# EAGLE board 19p_connector (EAGLE 6.3)
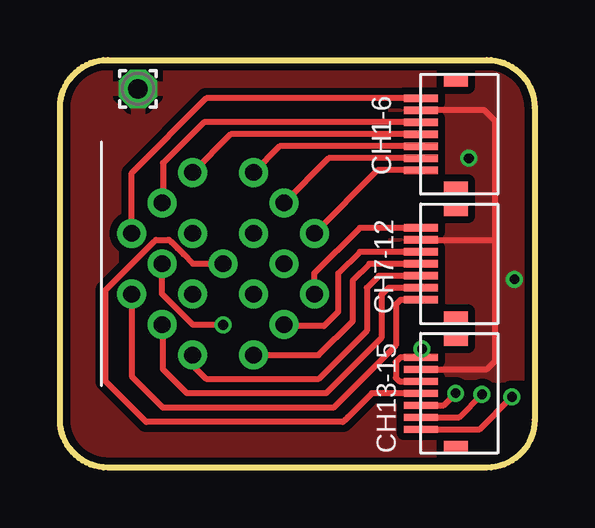
[diagram p0: board, top side]
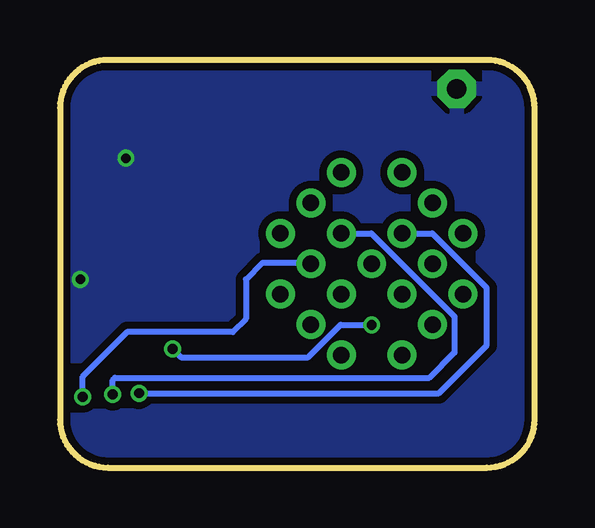
[diagram p1: board, bottom side, seen from below]

Size 19.8 x 17 mm. Coordinates in mm from the lower left corner, seen from the top.
Outline: 19.8,15 19.8,2 arc-90 17.8,0 2,0 arc-90 0,2 0,15 arc-90 2,17 17.8,17 arc-90 19.8,15
Copper layers (1*16): Top 0.035mm / dielectric 1.5mm / Bottom 0.035mm
Design rules "Fusion_eagle_rule_v1.1": minimum track width 6mil, minimum drill 12mil, track to track 6mil, track to pad 6mil, pad to pad 6mil, via to via 6mil, smd to smd 0mil, copper to edge 10mil, drill to drill 10mil, minimum pad ring 10mil, minimum via ring 6mil, stop-mask expansion 2mil, vias tented up to drill 100mil, thermal gap 10mil

## Footprints (pad centres in the part's own frame; a part is rotated, then mirrored left to right if it is on the bottom)
19PIN_LEMO = drill 0.7: P$1 -3.81,-1.27; P$2 -2.54,-2.54; P$3 -1.27,-3.81; P$4 1.27,-3.81; P$5 2.54,-2.54; P$6 3.81,-1.27; P$7 3.81,1.27; P$8 2.54,2.54; P$9 1.27,3.81; P$10 -1.27,3.81; P$11 -2.54,2.54; P$12 -3.81,1.27; P$13 -2.54,0; P$14 -1.27,-1.27; P$15 1.27,-1.27; P$16 2.54,0; P$17 1.27,1.27; P$18 -1.27,1.27; P$19 0,0
7P_ZIF_59453-071110EDHLF = smd 0.3 x 1.4: P$1 -1.5,1.6; P$2 -1,1.6; P$3 -0.5,1.6; P$4 0,1.6; P$5 0.5,1.6; P$6 1,1.6; P$7 1.5,1.6 | smd 0.52 x 1: ST1 -2.24,0.15; ST2 2.24,0.15
1,6/0,8 = drill 0.813 pad 1.6 octagon: 1 0,0

## Placement (x,y rotation side)
C1  19PIN_LEMO  [19PIN_LEMO]  6.8,8.5 180 top
H1  7P_ZIF_59453-071110EDHLF  [7P_ZIF_59453-071110EDHLF]  16.65,13.9 90 top
H2  7P_ZIF_59453-071110EDHLF  [7P_ZIF_59453-071110EDHLF]  16.65,8.5 90 top
H3  7P_ZIF_59453-071110EDHLF  [7P_ZIF_59453-071110EDHLF]  16.65,3.1 90 top
PAD1  [1,6/0,8]  3.25,15.8 0 top

## Library data of the parts
C1 H1-H3 = CYCFI_Con
PAD1 = wirepad

## Nets
CH1: C1.P$1 H1.P$1
CH2: C1.P$2 H1.P$2
CH3: C1.P$3 H1.P$3
CH4: C1.P$4 H1.P$4
CH5: C1.P$5 H1.P$5
CH6: C1.P$6 H1.P$7
CH7: C1.P$7 H2.P$1
CH8: C1.P$8 H2.P$2
CH9: C1.P$9 H2.P$3
CH10: C1.P$10 H2.P$4
CH11: C1.P$11 H2.P$5
CH12: C1.P$12 H2.P$7
CH13: C1.P$13 H3.P$1
CH14: C1.P$14 H3.P$2
CH15: C1.P$15 H3.P$3
GND: H1.P$6 H2.P$6 H3.P$6 PAD1.1
N$1: C1.P$19 H3.P$4
VCC: C1.P$16 H3.P$5 H3.P$7

## Tracks (layer width: path | path; a pad name or v marks a point on that pad's centre or on a via)
CH1
  Top 0.254: H1.P$1 13.24,12.4 C1.P$1
CH2
  Top 0.254: H1.P$2 11.2,12.9 C1.P$2
CH3
  Top 0.254: H1.P$3 9.16,13.4 C1.P$3
CH4
  Top 0.254: H1.P$4 7.12,13.9 C1.P$4
CH5
  Top 0.254: H1.P$5 6,14.4 4.3,12.7 4.3,11.08 C1.P$5
CH6
  Top 0.254: H1.P$7 6.1,15.4 2.99,12.29 C1.P$6
CH7
  Top 0.254: H2.P$1 14.2,7 14,6.8 14,5.1 11.4,2.5 4.3,2.5 2.99,3.81 C1.P$7
CH8
  Top 0.254: H2.P$2 13.7,7.5 13.4,7.2 13.4,5.4 11.1,3.1 5.3,3.1 4.3,4.1 4.3,5.92 C1.P$8
CH9
  Top 0.254: H2.P$3 13.3,8 12.8,7.5 12.8,5.7 10.8,3.7 6.1,3.7 5.53,4.27 C1.P$9
CH10
  Top 0.254: H2.P$4 12.9,8.5 12.2,7.8 12.2,6.1 10.79,4.69 C1.P$10
CH11
  Top 0.254: H2.P$5 12.5,9 11.6,8.1 11.6,6.5 11,5.9 9.4,5.9 C1.P$11
CH12
  Top 0.254: H2.P$7 12.5,10 10.6,8.1 C1.P$12
CH13  (via drill 0.4)
  Top 0.254: H3.P$1 17.5,1.6 v18.85,2.95
  Bottom 0.254: v18.85,2.95 18.85,3.8 17,5.65 12.6,5.65 12.05,6.2 12.05,7.85 11.35,8.55 9.39,8.55 C1.P$13
CH14  (via drill 0.4)
  Top 0.254: H3.P$2 16.65,2.1 v17.6,3.05
  Bottom 0.254: v17.6,3.05 17.6,3.65 17.5,3.75 4.4,3.75 3.35,4.8 3.35,6.3 6.82,9.77 C1.P$14
CH15  (via drill 0.4)
  Top 0.254: H3.P$3 16,2.6 v16.5,3.1
  Bottom 0.254: v16.5,3.1 4,3.1 2,5.1 2,7.5 4.27,9.77 C1.P$15
GND  (via drill 0.4)
  Top 0.254: H3.P$6 17.8,4.1 18.15,4.45 18.15,9.5 | 18.15,9.5 18.15,14.45 17.7,14.9 H1.P$6 | H2.P$6 18.15,9.5
  other vias: 17.05,12.9 18.95,7.85
  pour Top (isolate 0.305): 19.8,15 19.8,2 arc-90 17.8,0 1.8,0 arc-90 -0.2,2 -0.2,15 arc-90 1.8,17 17.8,17 arc-90
  pour Bottom (isolate 0.305): 19.8,15 19.8,2 arc-90 17.8,0 1.8,0 arc-90 -0.2,2 -0.2,15 arc-90 1.8,17 17.8,17 arc-90
N$1
  Top 0.254: H3.P$4 13.8,3.1 13,3.1 12,2.1 11.9,2 11.8,1.9 3.6,1.9 1.9,3.6 1.9,7.4 3.9,9.4 4,9.5 4.5,9.5 4.55,9.5 4.65,9.4 4.9,9.15 5.15,8.9 5.55,8.5 C1.P$19
VCC  (via drill 0.4)
  Top 0.254: 15.05,4.9 v15.1,4.95 15.05,4.9 | v6.8,5.95 5.55,5.95 4.55,6.95 4.25,7.25 C1.P$16 | H3.P$5 14.15,3.6 14,3.75 14,4.4 14.2,4.6 H3.P$7 15.05,4.9
  Bottom 0.254: v15.1,4.95 14.75,4.6 9.45,4.6 8.45,5.6 8.1,5.95 v6.8,5.95

## Text on the board
tNames: CH1-6 | CH7-12 | CH13-15
_tNames: CH1-6 | CH7-12 | CH13-15